# Altium PCB Eurocard VME 3U (3.937 x 6.299 inches).PCBDOC (part 2 of 2)
Units mil, origin at the board's own origin, x right, y up, seen from the top; angles counter-clockwise.
Board outline 6299 x 3937 mil, 2 copper layers (TopLayer, BottomLayer), stack 40.6 mil thick; 66 components, 125 nets, 577 pads, 748 vias.
Unrouted connection lines stored in the file: 53.
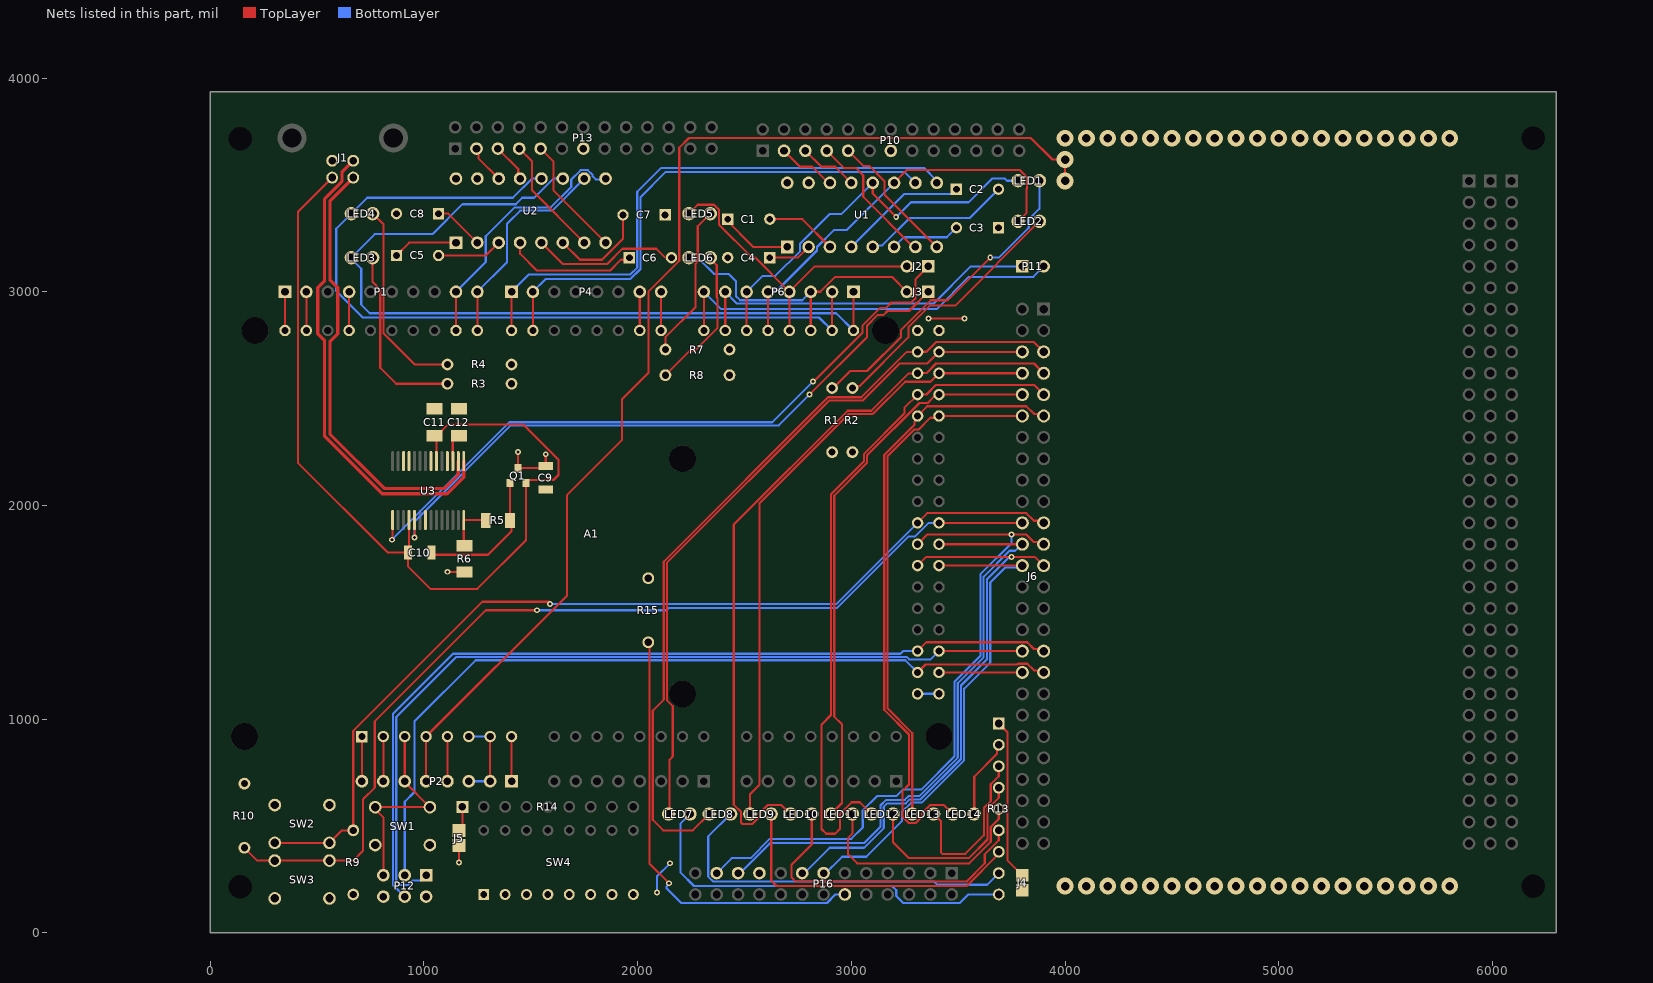
[diagram p2: the nets of this part, all layers, seen from the top]

## Via types
v1: diameter 78.74, hole 39.37, TopLayer to BottomLayer, 684 vias
v2: diameter 27.56, hole 13.78, TopLayer to BottomLayer, 64 vias

## Nets (pads, with @x,y where several pads share a name; then routed paths per layer and width w, separated by ;. In a path a pad name is that pad's centre, name@x,y a point inside that pad or via, vN(x,y) a via of type N, cw(c..) or ccw(c..) an arc to the next point about the centre after c; other vN are vias at no path point) (continued)
Ch7: A1.43 J6.26 P16.7 | length 2362.3
  TopLayer w10: A1.43@3410,1719 J6.26@3800,1719 J6.26@3799.5,1719.5
  BottomLayer w10: P16.7@2870,270 2956.65,356.65 3070,356.65 3236.5,523.15 3236.5,566.73 3279.76,610 3330,610 3527.99,807.99 3527.99,1142.99 3650,1265 3650,1640 3719.24,1709.24 3790.24,1709.24 J6.26@3800,1719
Ch8: A1.42 J6.25 P16.8 | length 2700.6
  TopLayer w10: A1.42@3310,1719 3351,1760 v2(3750,1760) 3859,1760 J6.25@3900,1719
  BottomLayer w10: P16.8@2770,270 2898.82,398.82 3060,398.82 3151.5,490.31 3151.5,590.08 3167.97,606.55 3255.1,606.55 3273.55,625 3323.79,625 3512.99,814.21 3512.99,1157.99 3635,1280 3635,1654.85 3740.15,1760 v2(3750,1760)
CTS1: A1.7 P4.1 U1.9 | length 2654.1
  TopLayer w10: A1.7@1410,2819 P4.1@1410,3000
  BottomLayer w10: P4.1@1410,3000 1490.91,3080.91 1965.91,3080.91 1998.15,3113.15 1998.15,3468.15 2110,3580 3340,3580 3400,3520 U1.9@3400,3510
CTS3: A1.9 P1.9 U2.9 | length 1230.7
  TopLayer w10: A1.9@1150,2819 P1.9@1150,3000
  BottomLayer w10: P1.9@1150,3000 1289.53,3139.53 1289.53,3260 1424.53,3395 1593.79,3395 1689.53,3490.74 1689.53,3525.43 1733.63,3569.53 1766.37,3569.53 1789.53,3546.37 1789.53,3540.77 1804.26,3526.03 1846.03,3526.03 U2.9@1850,3530
GND: A1.GND1 A1.GND2 A1.GND3 A1.GND4 A1.GND5 C3.1 C4.2 C7.1 C8.2 C9.2 C11.1 C12.1 J1.4 J4.2 P1.4 P2.2 P2.3 P10.7 P12.6 P13.7 P16.10 R1.1 R2.1 R3.1 R4.2 R7.1 R8.2 R15.1 SW1.1 SW1.3 SW2.1 SW2.3 SW3.2 SW3.4 SW4.1 SW4.2 SW4.3 SW4.4 SW4.5 SW4.6 SW4.7 SW4.8 U1.15 U2.15 U3.7 U3.18 U3.21 U3.25 U3.26 | length 852.9
  TopLayer w10: A1.GND3@650,2819 P1.4@650,3000 ; P2.2@1310,710 A1.GND2@1310,919
  BottomLayer w10: P2.3@1210,710 P2.2@1310,710 ; A1.GND1@1210,919 A1.GND2@1310,919 ; v2(2090,189.01) 2090,264.16 v2(2152.05,326.21) ; A1.GND4@3310,1119 A1.GND5@3410,1119
  other v1: 4000,219 4100,219 4200,219 4300,219 4400,219 4500,219 4600,219 4700,219 4800,219 4900,219 5000,219 5100,219 5200,219 5300,219 5400,219 5500,219 5600,219 5700,219 5800,219
LED1: A1.23 J6.6 LED7.2 | length 3266.5
  TopLayer w10: LED7.2@2145,556.55 2149.53,561.08 2149.53,810.83 2164.53,825.83 2164.53,1061.25 2137.01,1088.77 2137.01,1731.52 2897.24,2491.76 3052.76,2491.76 3225.84,2664.84 3355.84,2664.84 A1.23@3410,2719 J6.6@3800,2719
LED2: A1.22 J6.5 LED8.2 | length 3768.5
  TopLayer w10: LED8.2@2335,556.55 2258.45,480 2120,480 2070.47,529.53 2070.47,1040.47 2122.01,1092.01 2122.01,1737.73 2891.03,2506.76 3046.54,2506.76 3258.79,2719 A1.22@3310,2719 3310.75,2719.75 3351.73,2719.75 3396.49,2764.51 3854.49,2764.51 J6.5@3900,2719
LED3: A1.25 J6.8 LED9.2 | length 2954.3
  TopLayer w10: LED9.2@2525,556.55 2525,647.89 2570,692.89 2570,2010 2988.75,2428.75 3101.25,2428.75 3251.59,2579.09 3370.09,2579.09 A1.25@3410,2619 J6.8@3800,2619
LED4: A1.24 J6.7 LED10.2 | length 3487
  TopLayer w10: LED10.2@2715,556.55 2673.5,598.05 2607.81,598.05 2572.79,563.03 2572.79,545.66 2537.77,510.64 2489.36,510.64 2483.5,516.5 2483.5,566.73 2450,600.24 2450,1911.21 2982.54,2443.75 3093.75,2443.75 3268.27,2618.27 3309.27,2618.27 A1.24@3310,2619 3310.75,2619.75 3351.73,2619.75 3396.49,2664.51 3854.49,2664.51 J6.7@3900,2619
LED5: A1.27 J6.10 LED11.2 | length 2622.1
  TopLayer w10: LED11.2@2905,556.55 2956.22,607.77 2956.22,976.04 2920,1012.26 2920,2046.39 3073.61,2200 3073.61,2234.56 3318.56,2479.51 3356.97,2479.51 3388.14,2510.68 3401.68,2510.68 A1.27@3410,2519 J6.10@3800,2519
LED6: A1.26 J6.9 LED12.2 | length 3215.8
  TopLayer w10: LED12.2@3095,556.55 3040,611.55 3001.32,611.55 2946.5,556.73 2946.5,486.5 2924.14,464.14 2882.35,464.14 2860,486.5 2860,975 2905,1020 2905,2052.6 3058.61,2206.21 3058.61,2240.77 3248.29,2430.46 3248.29,2457.29 A1.26@3310,2519 3310.75,2519.75 3351.73,2519.75 3396.49,2564.51 3854.49,2564.51 J6.9@3900,2519
LED7: A1.29 J6.12 LED13.2 | length 2430.7
  TopLayer w10: LED13.2@3285,556.55 3285,935 3169.09,1050.91 3169.09,2230.03 3294.78,2355.73 3314.88,2355.73 3369.83,2410.68 3401.68,2410.68 A1.29@3410,2419 J6.12@3800,2419
LED8: A1.28 J6.11 LED14.2 | length 2937.1
  TopLayer w10: LED14.2@3475,556.55 3433.5,598.05 3367.81,598.05 3330,560.24 3330,542.87 3302.19,515.06 3267.81,515.06 3240,542.87 3240,665 3270,695 3270,928.79 3154.09,1044.7 3154.09,2236.25 3294.78,2376.95 3294.78,2392.02 3310,2407.24 A1.28@3310,2419 3355.51,2464.51 3818.85,2464.51 3854.6,2428.76 3890.24,2428.76 J6.11@3900,2419
NetA1_IOREF: A1.IOREF P2.7 | length 209
  TopLayer w10: P2.7@810,710 A1.IOREF@810,919
NetA1_NC: A1.NC P2.8 | length 209
  TopLayer w10: P2.8@710,710 A1.NC@710,919
NetA1_VIN: A1.VIN P2.1 | length 209
  TopLayer w10: P2.1@1410,710 A1.VIN@1410,919
NetC1_1: C1.1 U1.1 | length 342.3
  TopLayer w10: C1.1@2411.57,3340 2541.57,3210 U1.1@2700,3210
NetC1_2: C1.2 U1.3 | length 345.4
  TopLayer w10: C1.2@2608.43,3340 2770,3340 U1.3@2900,3210
NetC2_1: C2.1 U1.4 | length 603.4
  BottomLayer w10: U1.4@3000,3210 3248.43,3458.43 3470,3458.43 C2.1@3491.57,3480
NetC2_2: C2.2 U1.5 | length 700.3
  BottomLayer w10: U1.5@3100,3210 3107.5,3217.5 3144.53,3217.5 3272.59,3345.57 3553.99,3345.57 C2.2@3688.43,3480
NetC3_2: C3.2 U1.6 | length 328.9
  BottomLayer w10: U1.6@3200,3210 3245.56,3255.56 3447.14,3255.56 C3.2@3491.57,3300
NetC4_1: C4.1 U1.2 | length 202.3
  TopLayer w10: C4.1@2618.43,3160 2750,3160 U1.2@2800,3210
NetC5_1: C5.1 U2.1 | length 303.3
  TopLayer w10: C5.1@871.57,3170 931.57,3230 U2.1@1150,3230
NetC5_2: C5.2 U2.3 | length 306.4
  TopLayer w10: C5.2@1068.43,3170 1290,3170 U2.3@1350,3230
NetC6_1: C6.1 U2.4 | length 635.4
  TopLayer w10: U2.4@1450,3230 1450,3177.4 1527.4,3100 1871.57,3100 1921.57,3150 C6.1@1980,3150
NetC6_2: C6.2 U2.5 | length 666.7
  TopLayer w10: U2.5@1550,3230 1650,3130 1857.21,3130 1928.79,3201.57 2086.85,3201.57 2128.43,3160
NetC7_2: C7.2 U2.6 | length 467
  TopLayer w10: U2.6@1650,3230 1730,3150 1832.97,3150 1931.57,3248.6 C7.2@1931.57,3360
NetC8_1: C8.1 U2.2 | length 237.9
  TopLayer w10: C8.1@1068.43,3365.91 1114.09,3365.91 U2.2@1250,3230
NetC10_1: C10.1 C11.2 J1.1 Q1.2 U3.4 U3.20 | length 4296.1
  TopLayer w10: J1.1@570.79,3539.71 J1.1@570.79,3534.65 410,3373.86 410,2200 830,1780 C10.1@924.88,1780 ; U3.4@930.43,1932.2 930.43,1785.55 C10.1@924.88,1780 ; U3.20@1058.39,2207.8 1058.39,2326.26 1057.64,2327.01 1060.83,2327.01 1113.82,2380 1463.63,2380 1630,2213.63 1630,2143.05 1606.24,2119.29 1488.19,2119.29 1477.4,2108.5 Q1.2@1477.4,2105.16 1477.4,1837.4 1250,1610 1030,1610 924.88,1715.12 C10.1@924.88,1780
NetC10_2: C10.2 Q1.1 R5.2 | length 653.3
  TopLayer w10: C10.2@1035.12,1780 1045.67,1769.45 1299.45,1769.45 1410,1880 1410,1923.09 R5.2@1403.09,1930 1402.6,1930.49 Q1.1@1402.6,2105.16
NetC12_2: C12.2 U3.17 | length 134.8
  TopLayer w10: U3.17@1135.16,2207.8 1135.16,2305.43 1156.73,2327.01 C12.2@1163.39,2327.01
NetJ2_1: J2.1 U3.1 | length 3204.9
  TopLayer w10: v2(850,1840) 852.94,1842.94 852.94,1931.48 U3.1@853.66,1932.2 ; v2(2820,2580) 2822.95,2580 3052.95,2810 3052.95,2842.95 3134.81,2924.81 3162.58,2924.81 3187.77,2950 3280,2950 3300,2970 3300,3059 J2.1@3360,3119
  BottomLayer w10: v2(850,1840) 1400,2390 2630,2390 v2(2820,2580)
NetJ3_1: J3.1 U3.5 | length 3037.9
  TopLayer w10: v2(956.02,1850) U3.5@956.02,1932.2 ; v2(2805,2520) 3073.88,2788.88 3073.88,2842.67 3123.21,2891.99 3150.98,2891.99 3168.99,2910 3270,2910 J3.1@3360,3000
  BottomLayer w10: v2(956.02,1850) 956.02,1924.81 1406.21,2375 2660,2375 v2(2805,2520)
NetJ4_1: J4.1 R13.1 | length 775.4
  TopLayer w10: R13.1@3688.43,981.57 R13.1@3690,980 3730,940 3730,340 J4.1@3800,270 ; J4.1@3778.43,260 J4.1@3790.87,247.56
NetJ5_2: J5.2 R14.1 | length 117.9
  TopLayer w10: J5.2@1164,478.74 1180,494.74 R14.1@1180,590
NetLED1_1: LED1.1 R1.2 | length 1495.7
  TopLayer w10: R1.2@2912.5,2547.5 2994.38,2629.38 3073.61,2629.38 3232.99,2788.77 3232.99,2822.22 3371.24,2960.47 3450.47,2960.47 v2(3650,3160)
  BottomLayer w10: R1.2@2905.61,2554.39 R1.2@2910,2550 ; v2(3650,3160) 3690,3160 3829.93,3299.93 3829.93,3338.61 3880,3388.68 LED1.1@3880,3520
NetLED2_1: LED2.1 R2.2 | length 1226
  TopLayer w10: R2.2@3005,2550 3013.63,2558.63 3038.21,2558.63 3266.91,2787.33 3266.91,2834.93 3367.45,2935.47 3485.47,2935.47 LED2.1@3880,3330
NetLED3_1: LED3.1 R3.2 | length 875.6
  TopLayer w10: LED3.1@760,3160 760,3045.9 795.47,3010.43 795.47,2644.53 870,2570 R3.2@1110,2570
NetLED4_1: LED4.1 R4.1 | length 940.5
  TopLayer w10: LED4.1@760,3365.91 810.47,3315.43 810.47,2806.58 957.05,2660 R4.1@1110,2660
NetLED5_1: LED5.1 R7.2 | length 722.9
  TopLayer w10: R7.2@2130,2730 2130,2787.05 2270.47,2927.53 2270.47,3131.79 2281.5,3142.81 2281.5,3307.4 LED5.1@2340,3365.91
NetLED6_1: LED6.1 R8.1 | length 678.2
  TopLayer w10: R8.1@2130,2610 2244.32,2724.32 2267.58,2724.32 2373.27,2830 2373.27,2971.2 2370.47,2973.99 2370.47,3124.72 2340,3155.19 LED6.1@2340,3160
NetLED7_1: LED7.1 R13.9 | length 1872.8
  BottomLayer w10: LED7.1@2245,556.55 2200,511.55 2200,284.1 2264.1,220 3190,220 3210,200 3210,173 3242.53,140.47 3507.59,140.47 3547.11,180 R13.9@3690,180
NetLED8_1: LED8.1 R13.8 | length 1734.1
  BottomLayer w10: LED8.1@2435,556.55 2330.47,452.02 2330.47,263.63 2353.63,240.47 3386.64,240.47 3401.64,225.47 3635.47,225.47 R13.8@3690,280
NetLED9_1: LED9.1 R13.7 | length 1459
  TopLayer w10: LED9.1@2625,556.55 2625,245 2650,220 3540,220 3690,370 R13.7@3690,380
NetLED10_1: LED10.1 R13.6 | length 1465.6
  TopLayer w10: LED10.1@2815,556.55 2815,414 2720,319 2720,260 2740,240 3538.79,240 3624.39,325.61 3624.39,367.51 3690,433.12 R13.6@3690,480
NetLED11_1: LED11.1 R13.5 | length 1092.9
  TopLayer w10: LED11.1@3005,556.55 3005,464.86 2985,444.86 2985,367.51 3026.9,325.61 3551.49,325.61 3652.44,426.56 3652.44,495.56 3690,533.12 R13.5@3690,580
NetLED12_1: LED12.1 R13.4 | length 905.6
  TopLayer w10: LED12.1@3195,556.55 3195,425 3270,350 3550,350 3637.44,437.44 3637.44,580.56 3690,633.12 R13.4@3690,680
NetLED13_1: LED13.1 R13.3 | length 786
  TopLayer w10: LED13.1@3385,556.55 3420,521.55 3420,375.86 3425.86,370 3533.63,370 3620,456.37 3620,584.33 3652.44,616.77 3652.44,695.56 3690,733.12 R13.3@3690,780
NetLED14_1: LED14.1 R13.2 | length 371.1
  TopLayer w10: LED14.1@3575,556.55 3575,731.37 3681.37,837.74 3681.37,871.37 R13.2@3690,880
NetP10_2: P10.2 U1.14 | length 277.1
  TopLayer w10: P10.2@2685,3660 2760,3585 2817.57,3585 2892.57,3510 U1.14@2900,3510
NetP10_3: P10.3 U1.13 | length 277.1
  TopLayer w10: P10.3@2785,3660 2860,3585 2925,3585 U1.13@3000,3510
NetP10_4: P10.4 U1.7 | length 660
  TopLayer w10: P10.4@2885,3660 2965,3580 3020,3580 3055.47,3544.53 3055.47,3444.53 3290,3210 U1.7@3300,3210
NetP10_5: P10.5 U1.8 | length 638.3
  TopLayer w10: P10.5@2985,3660 3055.47,3589.53 3083.44,3589.53 3155.47,3517.5 3155.47,3454.53 U1.8@3400,3210
NetP13_2: P13.2 U2.14 | length 183.1
  TopLayer w10: P13.2@1246,3670 1254.53,3661.47 1254.53,3625.47 U2.14@1350,3530
NetP13_3: P13.3 U2.13 | length 183.1
  TopLayer w10: P13.3@1346,3670 1441.47,3574.53 1441.47,3538.53 U2.13@1450,3530
NetP13_4: P13.4 U2.7 | length 565.9
  TopLayer w10: P13.4@1446,3670 1505.47,3610.53 1505.47,3474.53 U2.7@1750,3230
NetP13_5: P13.5 U2.8 | length 565.9
  TopLayer w10: P13.5@1546,3670 1605.47,3610.53 1605.47,3474.53 U2.8@1850,3230
NetP16_19: P16.19 R15.2 | length 2082.7
  TopLayer w10: R15.2@2045.47,1355.47 R15.2@2050,1360 2055.47,1354.53 2055.47,324.53 v2(2147.5,232.5)
  BottomLayer w10: v2(2147.5,232.5) 2147.5,227.75 2134.63,214.87 2134.63,210 2204.15,140.47 2886.37,140.47 2925.47,179.57 2969.57,179.57 P16.19@2970,180
NetR5_1: R5.1 R6.1 U3.14 | length 226.2
  TopLayer w10: R6.1@1190,1811.02 1186.34,1814.69 U3.14@1186.34,1932.2 1286.71,1932.2 R5.1@1288.91,1930
PI: A1.40 J6.23 P16.12 | length 3156.2
  TopLayer w10: A1.40@3310,1819 3355.51,1864.51 v2(3750,1864.51) 3818.85,1864.51 3854.6,1828.76 3890.24,1828.76 J6.23@3900,1819
  BottomLayer w10: P16.12@2374.53,284.53 2440,350 2528.79,350 2618.79,440 3000,440 3053.5,493.5 3053.5,573.74 3119.76,640 3210.5,640 3240.97,670.47 3326.83,670.47 3482.99,826.63 3482.99,1175.42 3603.79,1296.21 3603.79,1678.79 3750,1825 v2(3750,1864.51)
PR: A1.41 J6.24 P16.11 | length 2845.3
  TopLayer w10: A1.41@3410,1819 J6.24@3800,1819
  BottomLayer w10: P16.11@2470,270 2621.42,421.42 3061.39,421.42 3136.5,496.53 3136.5,596.5 3162.66,622.66 3249.99,622.66 3267.34,640 3317.57,640 3497.99,820.42 3497.99,1169.21 3618.79,1290 3618.79,1666.93 3740.15,1788.29 3766.35,1788.29 3797.05,1819 J6.24@3800,1819
Relais1: A1.53 J6.36 | length 390
  TopLayer w10: A1.53@3410,1219 J6.36@3800,1219
Relais2: A1.52 J6.35 P12.3 | length 3858.9
  TopLayer w10: A1.52@3310,1219 3347.22,1256.22 3776.2,1256.22 3779.49,1259.51 3823.85,1259.51 3854.6,1228.76 3890.24,1228.76 J6.35@3900,1219
  BottomLayer w10: P12.3@910,270 910,613.63 956.02,659.65 956.02,990 1242.24,1276.22 3252.78,1276.22 A1.52@3310,1219
Relais3: A1.51 J6.34 P12.1 | length 3999.5
  TopLayer w10: A1.51@3410,1319 J6.34@3800,1319
  BottomLayer w10: P12.1@1010,270 985.47,245.47 948.21,245.47 927.26,224.53 890,224.53 870.47,244.06 870.47,1010.47 1151.22,1291.22 3258.99,1291.22 3270.21,1280 3371,1280 A1.51@3410,1319
Relais4: A1.50 J6.33 P12.4 | length 4078.1
  TopLayer w10: A1.50@3310,1319 3351,1360 3823.36,1360 3854.6,1328.76 3890.24,1328.76 J6.33@3900,1319
  BottomLayer w10: P12.4@910,170 855.47,224.53 855.47,1025.47 1136.22,1306.22 3229.85,1306.22 3242.63,1319 A1.50@3310,1319
Reset: A1.RESET P2.6 P12.5 SW1.2 SW1.4 | length 970.8
  TopLayer w10: P12.5@810,270 811.58,271.58 811.58,538.42 772.05,577.95 SW1.4@772.05,588.58 SW1.2@1027.95,588.58 910,706.53 P2.6@910,710 A1.RESET@910,919
RTS1: A1.6 P4.2 U1.10 | length 2420.6
  TopLayer w10: A1.6@1510,2819 P4.2@1510,3000
  BottomLayer w10: P4.2@1510,3000 1569.69,3059.69 1965.91,3059.69 2013.15,3106.94 2013.15,3443.15 2130,3560 3250,3560 U1.10@3300,3510
RTS3: A1.8 P1.10 U2.10 | length 1006
  TopLayer w10: A1.8@1250,2819 P1.10@1250,3000
  BottomLayer w10: P1.10@1250,3000 1389.53,3139.53 1389.53,3319.53 1450,3380 1600,3380 U2.10@1750,3530
RX0: A1.0 P4.8 | length 181
  TopLayer w10: A1.0@2110,2819 P4.8@2110,3000
RX1: A1.16 LED1.2 P6.6 U1.12 | length 1857.5
  TopLayer w10: A1.16@2510,2819 P6.6@2510,3000 ; U1.12@3100,3510 3100,3460 v2(3210,3350)
  BottomLayer w10: P6.6@2510,3000 2584.69,3074.69 2644.69,3074.69 2760.47,3190.47 2760.47,3226.37 2897.59,3363.49 2953.49,3363.49 U1.12@3100,3510 ; v2(3210,3350) 3279,3419 3549,3419 3660,3530 3717.83,3530 3727.83,3520 LED1.2@3780,3520
RX2: A1.18 J2.2 LED5.2 P6.4 | length 1477.4
  TopLayer w10: LED5.2@2240,3365.91 2281.5,3407.4 2357.19,3407.4 2381.5,3383.09 2381.5,3312.79 2533.2,3161.09 2548.91,3161.09 P6.4@2710,3000 ; A1.18@2710,2819 P6.4@2710,3000 ; J2.2@3260,3119 2829,3119 P6.4@2710,3000
RX3: A1.20 LED4.2 P6.2 U2.12 | length 3936.4
  TopLayer w10: A1.20@2910,2819 P6.2@2910,3000
  BottomLayer w10: U2.12@1550,3530 1549.57,3529.57 1505.47,3529.57 1415.9,3440 734.09,3440 LED4.2@660,3365.91 590,3295.91 590,3004.1 714.1,2880 2849,2880 A1.20@2910,2819 ; P6.2@2910,3000 P6.2@2910,3010
SCL: A1.14 P6.8 P11.2 | length 1887.4
  TopLayer w10: A1.14@2310,2819 P6.8@2310,3000
  BottomLayer w10: P6.8@2310,3000 2391,2919 3399,2919 3550,3070 3851,3070 P11.2@3900,3119
SCL2: A1.SCL P1.1 | length 181
  TopLayer w10: A1.SCL@350,2819 P1.1@350,3000
SDA: A1.15 P6.7 P11.1 | length 1665.5
  TopLayer w10: A1.15@2410,2819 P6.7@2410,3000
  BottomLayer w10: P6.7@2410,3000 2464.53,2945.47 3385.74,2945.47 3559.27,3119 P11.1@3800,3119
SDA2: A1.SDA P1.2 | length 181
  TopLayer w10: A1.SDA@450,2819 P1.2@450,3000
Tactile1: A1.38 J6.21 R9.2 SW2.2 SW2.4 | length 4539.6
  TopLayer w10: SW2.2@302.05,421.42 SW2.4@557.95,421.42 616.53,480 R9.2@669.21,480 669.21,945.82 1273.39,1550 1584.14,1550 1590,1544.14 v2(1590,1540) ; A1.38@3310,1919 3355.51,1964.51 3818.85,1964.51 3854.6,1928.76 3890.24,1928.76 J6.21@3900,1919
  BottomLayer w10: v2(1590,1540) 2931,1540 A1.38@3310,1919
Tactile2: A1.39 J6.22 R10.1 SW3.1 SW3.3 | length 4641.8
  TopLayer w10: R10.1@160,398.82 220.24,338.58 SW3.1@302.05,338.58 SW3.3@557.95,338.58 668.58,338.58 715,385 715,625 770,680 770,990 1290,1510 v2(1530,1510) ; A1.39@3410,1919 J6.22@3800,1919
  BottomLayer w10: v2(1530,1510) 2135,1510 2145,1520 2932.21,1520 3267.95,1855.73 3298.68,1855.73 3361.95,1919 A1.39@3410,1919
TX0: A1.1 P4.7 | length 181
  TopLayer w10: A1.1@2010,2819 P4.7@2010,3000
TX1: A1.17 LED2.2 P6.5 U1.11 | length 1875.9
  TopLayer w10: A1.17@2610,2819 P6.5@2610,3000 ; U1.11@3200,3510 3260,3570 3788.68,3570 3821.5,3537.19 3821.5,3481.5 3820,3480 3820,3370 LED2.2@3780,3330
  BottomLayer w10: P6.5@2610,3000 2618.63,3008.63 2654.53,3008.63 2839.53,3193.63 2839.53,3209.53 2920,3290 2980,3290 U1.11@3200,3510
TX2: A1.19 J3.2 LED6.2 P6.3 | length 1399
  TopLayer w10: A1.19@2810,2819 P6.3@2810,3000 2810.43,3000.43 2854.53,3000.43 2924.1,3070 3190,3070 J3.2@3260,3000
  BottomLayer w10: LED6.2@2240,3160 2245.18,3154.82 2286.5,3154.82 2358.2,3083.12 2426.88,3083.12 2460,3050 2460,2980 2479.53,2960.47 2770.47,2960.47 P6.3@2810,3000
TX3: A1.21 LED3.2 P6.1 U2.11 | length 3917.1
  TopLayer w10: A1.21@3010,2819 P6.1@3010,3000
  BottomLayer w10: U2.11@1650,3530 1649.57,3529.57 1605.47,3529.57 1515.9,3440 1460,3440 1430,3410 1180,3410 1040,3270 770,3270 LED3.2@660,3160 660,3154.24 706.5,3107.75 706.5,2940 746.5,2900 2929,2900 A1.21@3010,2819
USB_N: J1.2 U3.16 | length 2073.8
  TopLayer w15: J1.2@669.21,3534.65 669.21,3533.43 560,3424.22 560,3055.81 568.79,3047.03 569.48,3047.03 597.03,3019.48 597.03,2803.47 560,2766.45 560,2334.64 814.64,2080 1097.99,2080 1161.04,2143.05 1161.04,2207.5 U3.16@1160.75,2207.8
USB_P: J1.3 U3.15 | length 2241.2
  TopLayer w15: J1.3@669.21,3613.39 616.24,3560.41 616.24,3515.82 535,3434.58 535,3051.51 502.97,3019.48 502.97,2803.47 535,2771.45 535,2324.29 804.29,2055 1108.35,2055 1186.04,2132.7 1186.04,2207.5 U3.15@1186.34,2207.8
VCC_3V3: A1.3V3 P2.5 | length 5421.4
  TopLayer w10: P2.5@1010,710 A1.3V3@1010,919 1670,1579 1670,2050 1926.22,2306.22 1926.22,2496.22 2050,2620 2050,3000 2157.43,3107.43 2157.58,3107.43 2195,3144.85 2195,3674.9 2240.18,3720.08 3840,3720.08 3941.08,3619 v1(4000,3619) v1(4000,3519)
VCC_5V: A1.5V_1 A1.5V_2 A1.5V_3 C9.1 J5.1 P2.4 P12.2 Q1.3 R6.2 R9.1 R10.2 U1.16 U2.16 | length 802.6
  TopLayer w10: P2.4@1110,710 A1.5V_1@1110,919 ; v2(1110,1690) 1111.02,1688.98 R6.2@1190,1688.98 ; v2(1164,330) J5.1@1164,408.74 ; v2(1440,2250) Q1.3@1440,2174.84 1559.72,2174.84 C9.1@1570,2185.12 v2(1570,2240) ; v2(3360.37,2874.51) 3528.7,2874.51 v2(3530,2875.81)
  other v1: 4000,3719 4100,3719 4200,3719 4300,3719 4400,3719 4500,3719 4600,3719 4700,3719 4800,3719 4900,3719 5000,3719 5100,3719 5200,3719 5300,3719 5400,3719 5500,3719 5600,3719 5700,3719 5800,3719
pads on no net: A1.None J1.Shell P9.97 P9.98 P9.A1 P9.A2 P9.A3 P9.A4 P9.A5 P9.A6 P9.A7 P9.A8 P9.A9 P9.A10 P9.A11 P9.A12 P9.A13 P9.A14 P9.A15 P9.A16 P9.A17 P9.A18 P9.A19 P9.A20 P9.A21 P9.A22 P9.A23 P9.A24 P9.A25 P9.A26 P9.A27 P9.A28 P9.A29 P9.A30 P9.A31 P9.A32 P9.B1 P9.B2 P9.B3 P9.B4 P9.B5 P9.B6 P9.B7 P9.B8 P9.B9 P9.B10 P9.B11 P9.B12 P9.B13 P9.B14 P9.B15 P9.B16 P9.B17 P9.B18 P9.B19 P9.B20 P9.B21 P9.B22 P9.B23 P9.B24 P9.B25 P9.B26 P9.B27 P9.B28 P9.B29 P9.B30 P9.B31 P9.B32 P9.C1 P9.C2 P9.C3 P9.C4 P9.C5 P9.C6 P9.C7 P9.C8 P9.C9 P9.C10 P9.C11 P9.C12 P9.C13 P9.C14 P9.C15 P9.C16 P9.C17 P9.C18 P9.C19 P9.C20 P9.C21 P9.C22 P9.C23 P9.C24 P9.C25 P9.C26 P9.C27 P9.C28 P9.C29 P9.C30 P9.C31 P9.C32 P10.1 P10.6 P10.8 P10.9 P10.10 P10.11 P10.12 P10.13 P10.14 P10.15 P10.16 P10.17 P10.18 P10.19 P10.20 P10.21 P10.22 P10.23 P10.24 P10.25 P10.26 P13.1 P13.6 P13.8 P13.9 P13.10 P13.11 P13.12 P13.13 P13.14 P13.15 P13.16 P13.17 P13.18 P13.19 P13.20 P13.21 P13.22 P13.23 P13.24 P13.25 P13.26 P16.9 P16.13 P16.14 P16.15 P16.16 P16.17 P16.18 P16.20 P16.21 P16.22 P16.23 P16.24 P16.25 P16.26 U3.2 U3.3 U3.6 U3.8 U3.9 U3.10 U3.11 U3.12 U3.13 U3.19 U3.22 U3.23 U3.24 U3.27 U3.28
copper on no net:
  other v1: 4000,319 4100,319 4200,319 4300,319 4400,319 4500,319 4600,319 4700,319 4800,319 4900,319 5000,319 5100,319 5200,319 5300,319 5400,319 5500,319 5600,319 5700,319 5800,319 4000,419 4100,419 4200,419 4300,419 4400,419 4500,419 4600,419 4700,419 4800,419 4900,419 5000,419 5100,419 5200,419 5300,419 5400,419 5500,419 5600,419 5700,419 5800,419 4000,519 4100,519 4200,519 4300,519 4400,519 4500,519 4600,519 4700,519 4800,519 4900,519 5000,519 5100,519 5200,519 5300,519 5400,519 5500,519 5600,519 5700,519 5800,519 4000,619 4100,619 4200,619 4300,619 4400,619 4500,619 4600,619 4700,619 4800,619 4900,619 5000,619 5100,619 5200,619 5300,619 5400,619 5500,619 5600,619 5700,619 5800,619 4000,719 4100,719 4200,719 4300,719 4400,719 4500,719 4600,719 4700,719 4800,719 4900,719 5000,719 5100,719 5200,719 5300,719 5400,719 5500,719 5600,719 5700,719 5800,719 4000,819 4100,819 4200,819 4300,819 4400,819 4500,819 4600,819 4700,819 4800,819 4900,819 5000,819 5100,819 5200,819 5300,819 5400,819 5500,819 5600,819 5700,819 5800,819 4000,919 4100,919 4200,919 4300,919 4400,919 4500,919 4600,919 4700,919 4800,919 4900,919 5000,919 5100,919 5200,919 5300,919 5400,919 5500,919 5600,919 5700,919 5800,919 4000,1019 4100,1019 4200,1019 4300,1019 4400,1019 4500,1019 4600,1019 4700,1019 4800,1019 4900,1019 5000,1019 5100,1019 5200,1019 5300,1019 5400,1019 5500,1019 5600,1019 5700,1019 5800,1019 4000,1119 4100,1119 4200,1119 4300,1119 4400,1119 4500,1119 4600,1119 4700,1119 4800,1119 4900,1119 5000,1119 5100,1119 5200,1119 5300,1119 5400,1119 5500,1119 5600,1119 5700,1119 5800,1119 4000,1219 4100,1219 4200,1219 4300,1219 4400,1219 4500,1219 4600,1219 4700,1219 4800,1219 4900,1219 5000,1219 5100,1219 5200,1219 5300,1219 5400,1219 5500,1219 5600,1219 5700,1219 5800,1219 4000,1319 4100,1319 4200,1319 4300,1319 4400,1319 4500,1319 4600,1319 4700,1319 4800,1319 4900,1319 5000,1319 5100,1319 5200,1319 5300,1319 5400,1319 5500,1319 5600,1319 5700,1319 5800,1319 4000,1419 4100,1419 4200,1419 4300,1419 4400,1419 4500,1419 4600,1419 4700,1419 4800,1419 4900,1419 5000,1419 5100,1419 5200,1419 5300,1419 5400,1419 5500,1419 5600,1419 5700,1419 5800,1419 4000,1519 4100,1519 4200,1519 4300,1519 4400,1519 4500,1519 4600,1519 4700,1519 4800,1519 4900,1519 5000,1519 5100,1519 5200,1519 5300,1519 5400,1519 5500,1519 5600,1519 5700,1519 5800,1519 4000,1619 4100,1619 4200,1619 4300,1619 4400,1619 4500,1619 4600,1619 4700,1619 4800,1619 4900,1619 5000,1619 5100,1619 5200,1619 5300,1619 5400,1619 5500,1619 5600,1619 5700,1619 5800,1619 4000,1719 4100,1719 4200,1719 4300,1719 4400,1719 4500,1719 4600,1719 4700,1719 4800,1719 4900,1719 5000,1719 5100,1719 5200,1719 5300,1719 5400,1719 5500,1719 5600,1719 5700,1719 5800,1719 4000,1819 4100,1819 4200,1819 4300,1819 4400,1819 4500,1819 4600,1819 4700,1819 4800,1819 4900,1819 5000,1819 5100,1819 5200,1819 5300,1819 5400,1819 5500,1819 5600,1819 5700,1819 5800,1819 4000,1919 4100,1919 4200,1919 4300,1919 4400,1919 4500,1919 4600,1919 4700,1919 4800,1919 4900,1919 5000,1919 5100,1919 5200,1919 5300,1919 5400,1919 5500,1919 5600,1919 5700,1919 5800,1919 4000,2019 4100,2019 4200,2019 4300,2019 4400,2019 4500,2019 4600,2019 4700,2019 4800,2019 4900,2019 5000,2019 5100,2019 5200,2019 5300,2019 5400,2019 5500,2019 5600,2019 5700,2019 5800,2019 4000,2119 4100,2119 4200,2119 4300,2119 4400,2119 4500,2119 4600,2119 4700,2119 4800,2119 4900,2119 5000,2119 5100,2119 5200,2119 5300,2119 5400,2119 5500,2119 5600,2119 5700,2119 5800,2119 4000,2219 4100,2219 4200,2219 4300,2219 4400,2219 4500,2219 4600,2219 4700,2219 4800,2219 4900,2219 5000,2219 5100,2219 5200,2219 5300,2219 5400,2219 5500,2219 5600,2219 5700,2219 5800,2219 4000,2319 4100,2319 4200,2319 4300,2319 4400,2319 4500,2319 4600,2319 4700,2319 4800,2319 4900,2319 5000,2319 5100,2319 5200,2319 5300,2319 5400,2319 5500,2319 5600,2319 5700,2319 5800,2319 4000,2419 4100,2419 4200,2419 4300,2419 4400,2419 4500,2419 4600,2419 4700,2419 4800,2419 4900,2419 5000,2419 5100,2419 5200,2419 5300,2419 5400,2419 5500,2419 5600,2419 5700,2419 5800,2419 4000,2519 4100,2519 4200,2519 4300,2519 4400,2519 4500,2519 4600,2519 4700,2519 4800,2519 4900,2519 5000,2519 5100,2519 5200,2519 5300,2519 5400,2519 5500,2519 5600,2519 5700,2519 5800,2519 4000,2619 4100,2619 4200,2619 4300,2619 4400,2619 4500,2619 4600,2619 4700,2619 4800,2619 4900,2619 5000,2619 5100,2619 5200,2619 5300,2619 5400,2619 5500,2619 5600,2619 5700,2619 5800,2619 4000,2719 4100,2719 4200,2719 4300,2719 4400,2719 4500,2719 4600,2719 4700,2719 4800,2719 4900,2719 5000,2719 5100,2719 5200,2719 5300,2719 5400,2719 5500,2719 5600,2719 5700,2719 5800,2719 4000,2819 4100,2819 4200,2819 4300,2819 4400,2819 4500,2819 4600,2819 4700,2819 4800,2819 4900,2819 5000,2819 5100,2819 5200,2819 5300,2819 5400,2819 5500,2819 5600,2819 5700,2819 5800,2819 4000,2919 4100,2919 4200,2919 4300,2919 4400,2919 4500,2919 4600,2919 4700,2919 4800,2919 4900,2919 5000,2919 5100,2919 5200,2919 5300,2919 5400,2919 5500,2919 5600,2919 5700,2919 5800,2919 4000,3019 4100,3019 4200,3019 4300,3019 4400,3019 4500,3019 4600,3019 4700,3019 4800,3019 4900,3019 5000,3019 5100,3019 5200,3019 5300,3019 5400,3019 5500,3019 5600,3019 5700,3019 5800,3019 4000,3119 4100,3119 4200,3119 4300,3119 4400,3119 4500,3119 4600,3119 4700,3119 4800,3119 4900,3119 5000,3119 5100,3119 5200,3119 5300,3119 5400,3119 5500,3119 5600,3119 5700,3119 5800,3119 4000,3219 4100,3219 4200,3219 4300,3219 4400,3219 4500,3219 4600,3219 4700,3219 4800,3219 4900,3219 5000,3219 5100,3219 5200,3219 5300,3219 5400,3219 5500,3219 5600,3219 5700,3219 5800,3219 4000,3319 4100,3319 4200,3319 4300,3319 4400,3319 4500,3319 4600,3319 4700,3319 4800,3319 4900,3319 5000,3319 5100,3319 5200,3319 5300,3319 5400,3319 5500,3319 5600,3319 5700,3319 5800,3319 4000,3419 4100,3419 4200,3419 4300,3419 4400,3419 4500,3419 4600,3419 4700,3419 4800,3419 4900,3419 5000,3419 5100,3419 5200,3419 5300,3419 5400,3419 5500,3419 5600,3419 5700,3419 5800,3419 4100,3519 4200,3519 4300,3519 4400,3519 4500,3519 4600,3519 4700,3519 4800,3519 4900,3519 5000,3519 5100,3519 5200,3519 5300,3519 5400,3519 5500,3519 5600,3519 5700,3519 5800,3519 4100,3619 4200,3619 4300,3619 4400,3619 4500,3619 4600,3619 4700,3619 4800,3619 4900,3619 5000,3619 5100,3619 5200,3619 5300,3619 5400,3619 5500,3619 5600,3619 5700,3619 5800,3619

## Polygon pours and split planes (outlines as drawn)
GND on TopLayer (solid, pour order 8): 3850,220 3852,222 5850,222 5850,122 3850,122
no net on TopLayer (solid, pour order 4): 5900,3790
GND on TopLayer (solid, pour order 0): 250,130 250,330 75,330 75,3630 250,3630 250,3830 3960,3830 3960,130
VCC_5V on BottomLayer (solid, pour order 6): 5853.29,3819 5853.29,3719 3853.29,3719 3853.29,3819
VCC_5V on BottomLayer (solid, pour order 2): 240,3819 240,3619 65,3619 65,319 240,319 240,119 3950,119 3950,3819

## Keep-outs
KeepOutLayer:
  lines w8: 65,319 240,319 240,119 6090,119 6090,319 6240,319 6240,3619 6090,3619 6090,3819 240,3819 240,3619 65,3619 65,319

## Other copper
TopLayer:
  text ".GTL" at 5999,4087 h90
BottomLayer:
  text "P/N XXXXXX-XXX REV A" at 1320,4137 h75
  text ".GBL" at 5999,4087 h90

## Silkscreen, mask and mechanical layers (free items; w line width, h text height)
TopOverlay:
  circle w10: c1090,270 r10
  circle w10: c140,217 r112.5
  circle w10: c140,3717 r112.5
  rectangle: 1080,260 1100,280
  rectangle: 1090,260 1100,270
  rectangle: 281,4630 1031,4830
  rectangle: 281,4340 1031,4540
  lines w10: 1392.59,4732.97 ccw(c1441,4772.5) 1392.71,4732.83 ; 3947.01,0 3947.01,3937.01
  text "C" at 1496,4735 h60
  text "2002 COMPANY NAME" at 1646,4735 h75
  text "S/N" at 31,4687.5 h75
  text "BOARD NAME" at 1496,4560 h75
  text "ASSY NO.: XXXXXX" at 1496,4410 h75
  text "REV" at 31,4390 h75
  text ".GTO" at 5999,4087 h90
  text "SDA" at 3710,3010 h40
TopPaste:
  text ".GTP" at 5999,4087 h90
BottomPaste:
  text ".GBP" at 5999,4087 h90
TopSolder:
  text ".GTS" at 5999,4087 h90
BottomSolder:
  text ".GBS" at 5999,4087 h90
Mechanical1:
  the board outline again, w20
Mechanical4:
  text ".Pcb_File_Name_No_Path" at 4099,4277 h90
  text ".Printout_Name" at 4099,4087 h90
DrillDrawing:
  text ".LEGEND" at 6815,189 h90
  text "Drilling Details." at 6815,39 h90

## Dimensions
140,-20 to 0,0 on Mechanical4
-20,217 to 0,0 on Mechanical4

## Text inside footprints (layer, text, board x,y; h text height)
LED1: TopOverlay "K" at 3930,3470 h30; Mechanical15 "K" at 3930,3470 h30
LED2: TopOverlay "K" at 3930,3280 h30; Mechanical15 "K" at 3930,3280 h30
LED3: TopOverlay "K" at 810,3110 h30; Mechanical15 "K" at 810,3110 h30
LED4: TopOverlay "K" at 810,3315.91 h30; Mechanical15 "K" at 810,3315.91 h30
LED5: TopOverlay "K" at 2390,3315.91 h30; Mechanical15 "K" at 2390,3315.91 h30
LED6: TopOverlay "K" at 2390,3110 h30; Mechanical15 "K" at 2390,3110 h30
LED7: TopOverlay "K" at 2295,506.55 h30; Mechanical15 "K" at 2295,506.55 h30
LED8: TopOverlay "K" at 2485,506.55 h30; Mechanical15 "K" at 2485,506.55 h30
LED9: TopOverlay "K" at 2675,506.55 h30; Mechanical15 "K" at 2675,506.55 h30
LED10: TopOverlay "K" at 2865,506.55 h30; Mechanical15 "K" at 2865,506.55 h30
LED11: TopOverlay "K" at 3055,506.55 h30; Mechanical15 "K" at 3055,506.55 h30
LED12: TopOverlay "K" at 3245,506.55 h30; Mechanical15 "K" at 3245,506.55 h30
LED13: TopOverlay "K" at 3435,506.55 h30; Mechanical15 "K" at 3435,506.55 h30
LED14: TopOverlay "K" at 3625,506.55 h30; Mechanical15 "K" at 3625,506.55 h30
P9: TopOverlay "1" at 6240,3506.5 h60 r90; TopOverlay "32" at 6240,369 h60 r90; TopOverlay "A" at 6040,306.5 h60; TopOverlay "B" at 5965,306.5 h60; TopOverlay "C" at 5877.5,306.5 h60; TopOverlay "A" at 6027.5,3569 h60; TopOverlay "B" at 5952.5,3569 h60; TopOverlay "C" at 5877.5,3569 h60
P16: TopOverlay "26" at 2210,200 h50 r180; TopOverlay "13" at 2210,300 h50 r180; TopOverlay "14" at 3610,200 h50 r180; TopOverlay "1" at 3550,300 h50 r180